# Altium PCB STATION_CT.PcbDoc
Units mil, origin at the board's own origin, x right, y up, seen from the top; angles counter-clockwise.
Board outline 2700 x 2450 mil, 2 copper layers (Top Layer, Bottom Layer); 29 components, 29 nets, 128 pads, 13 vias.
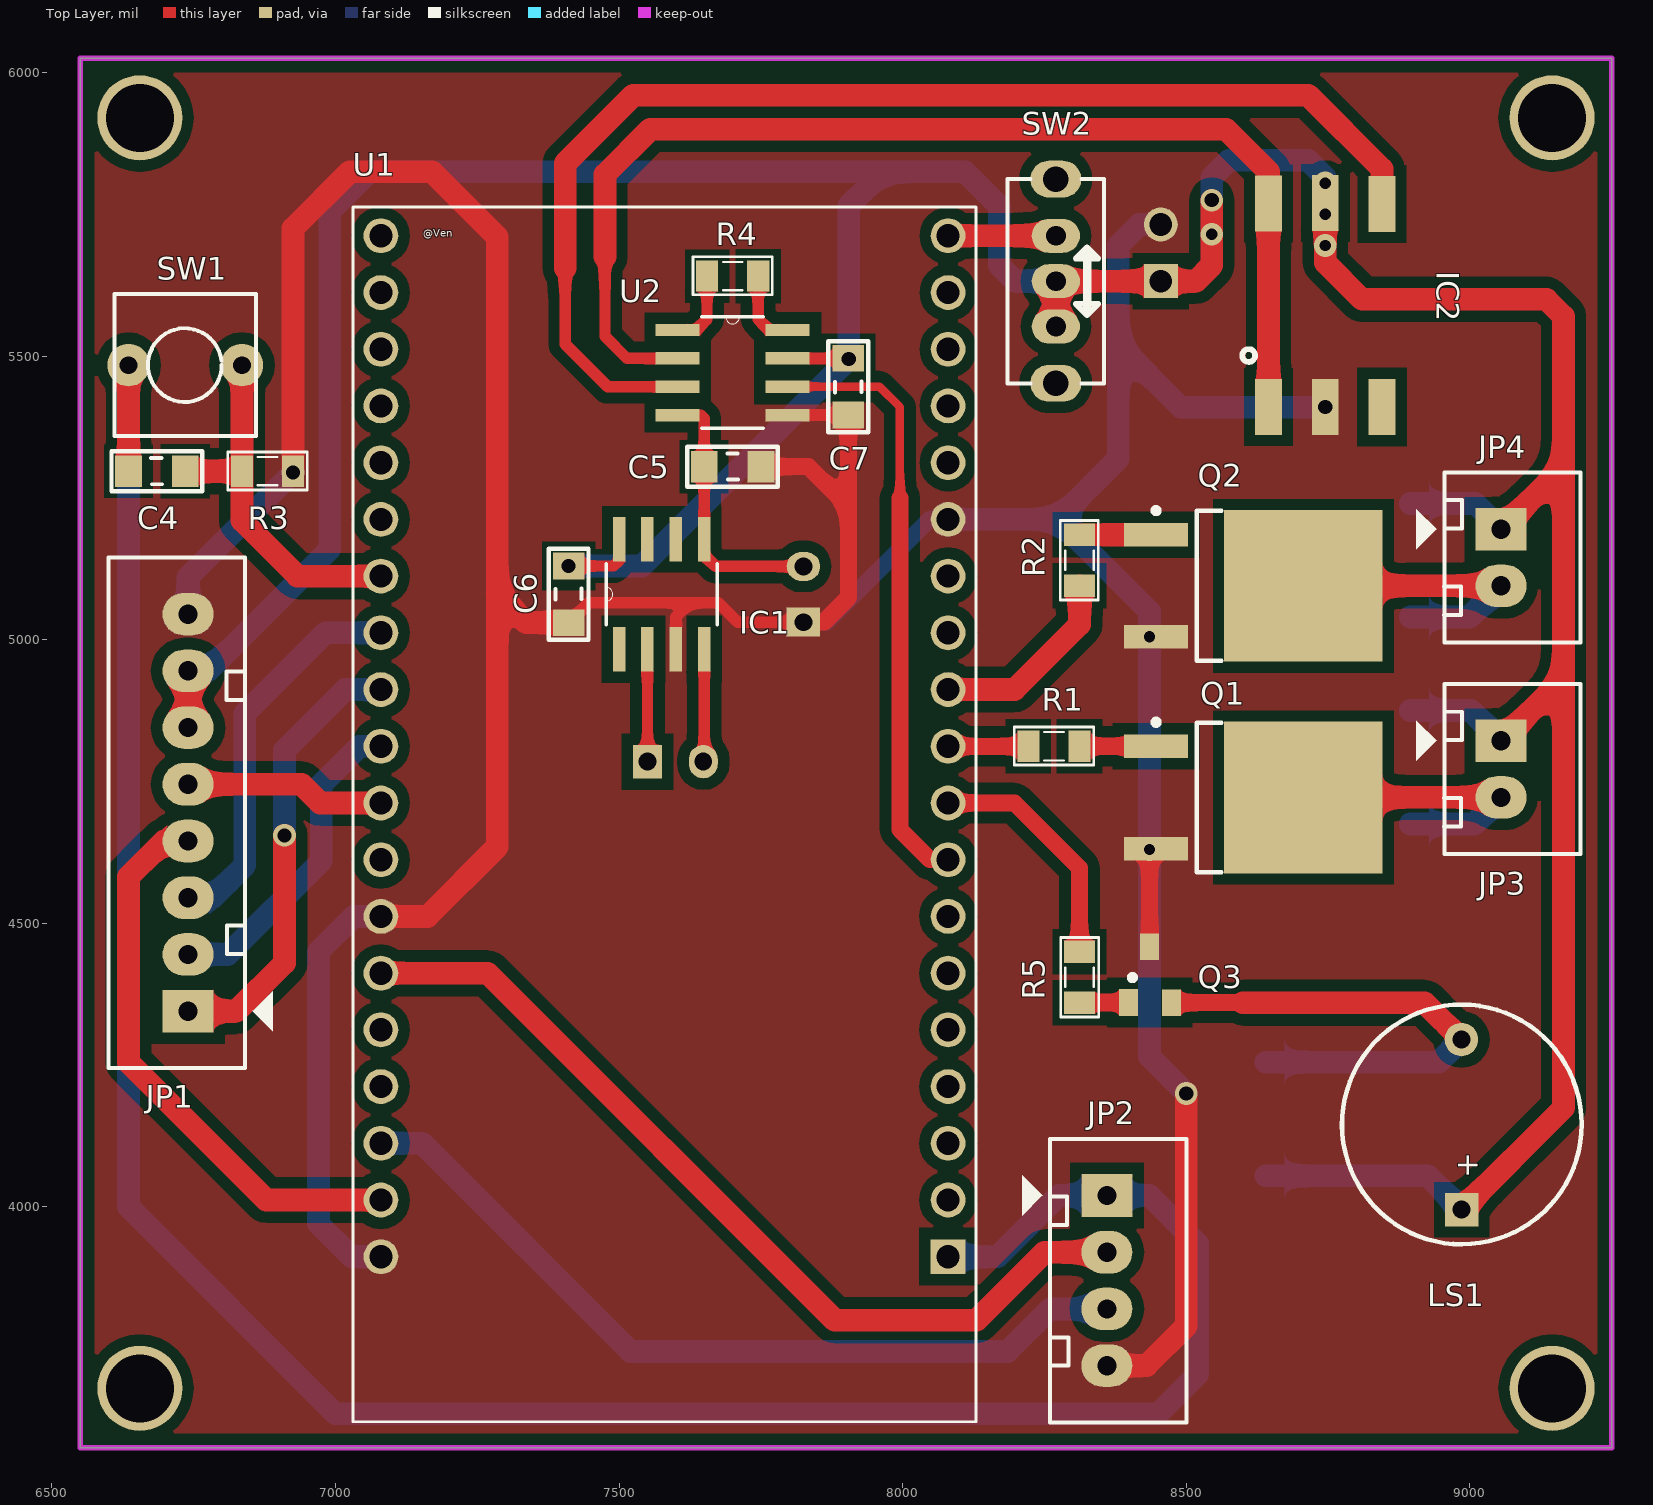
[diagram p0: Top Layer view]
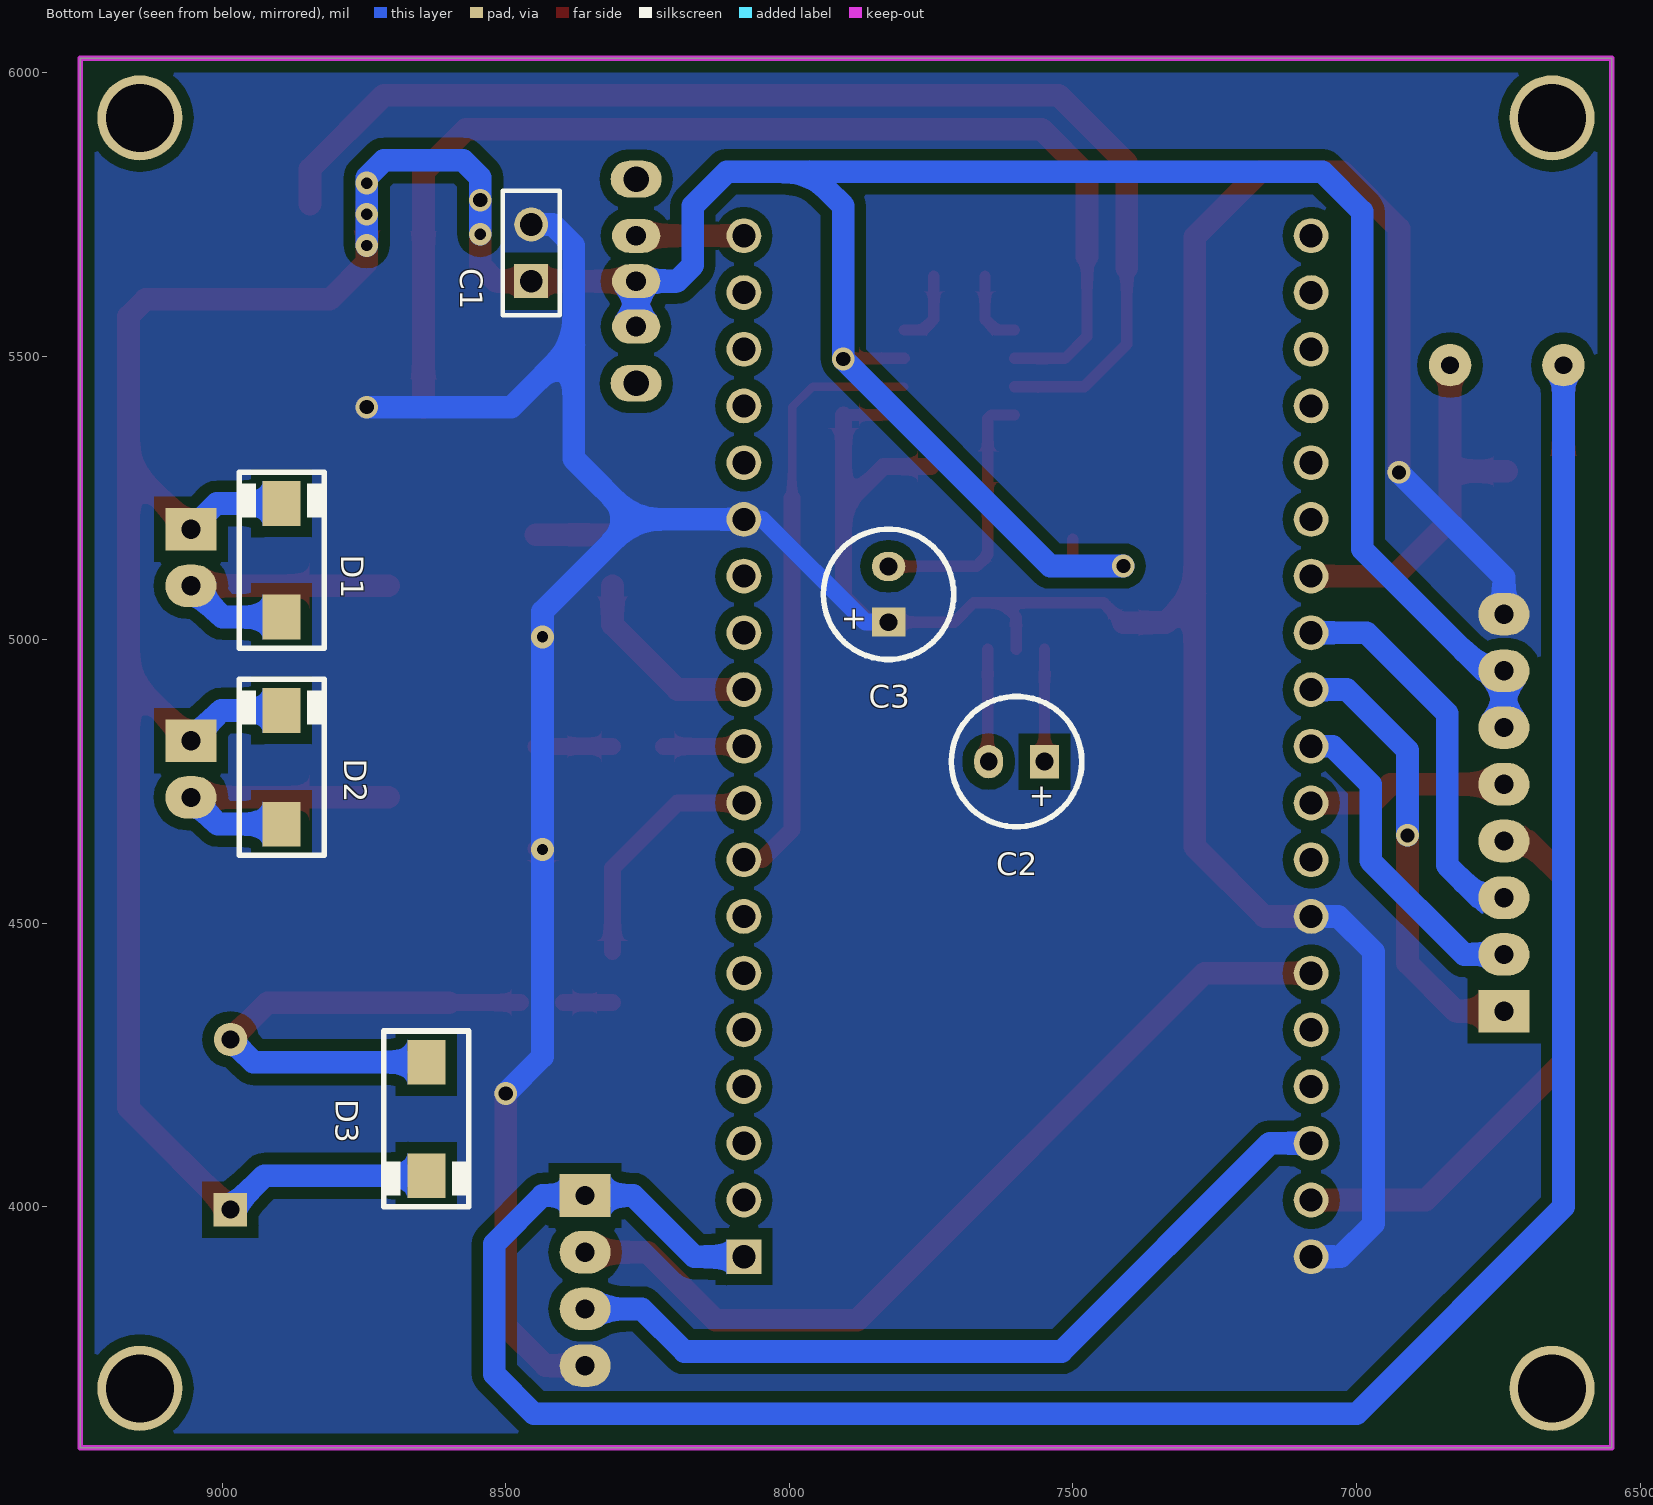
[diagram p1: Bottom Layer view, seen from below]
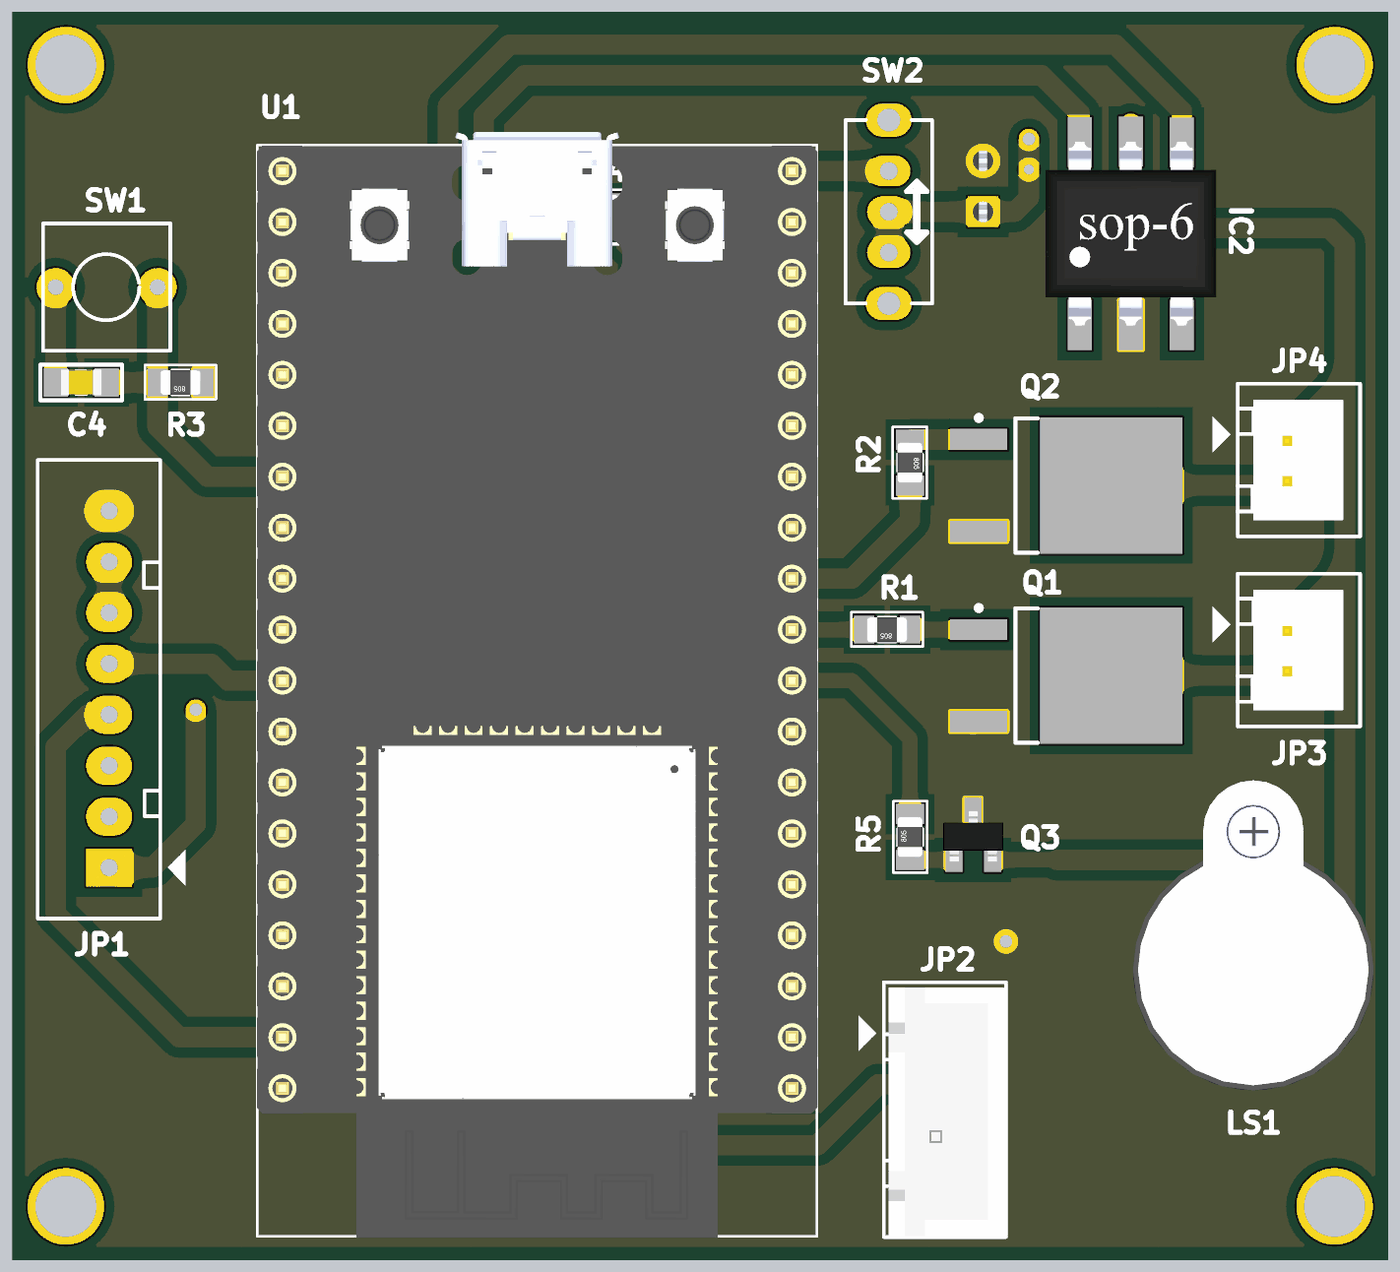
[diagram p2: 3D render of the assembled board from above, using the file's embedded part models]
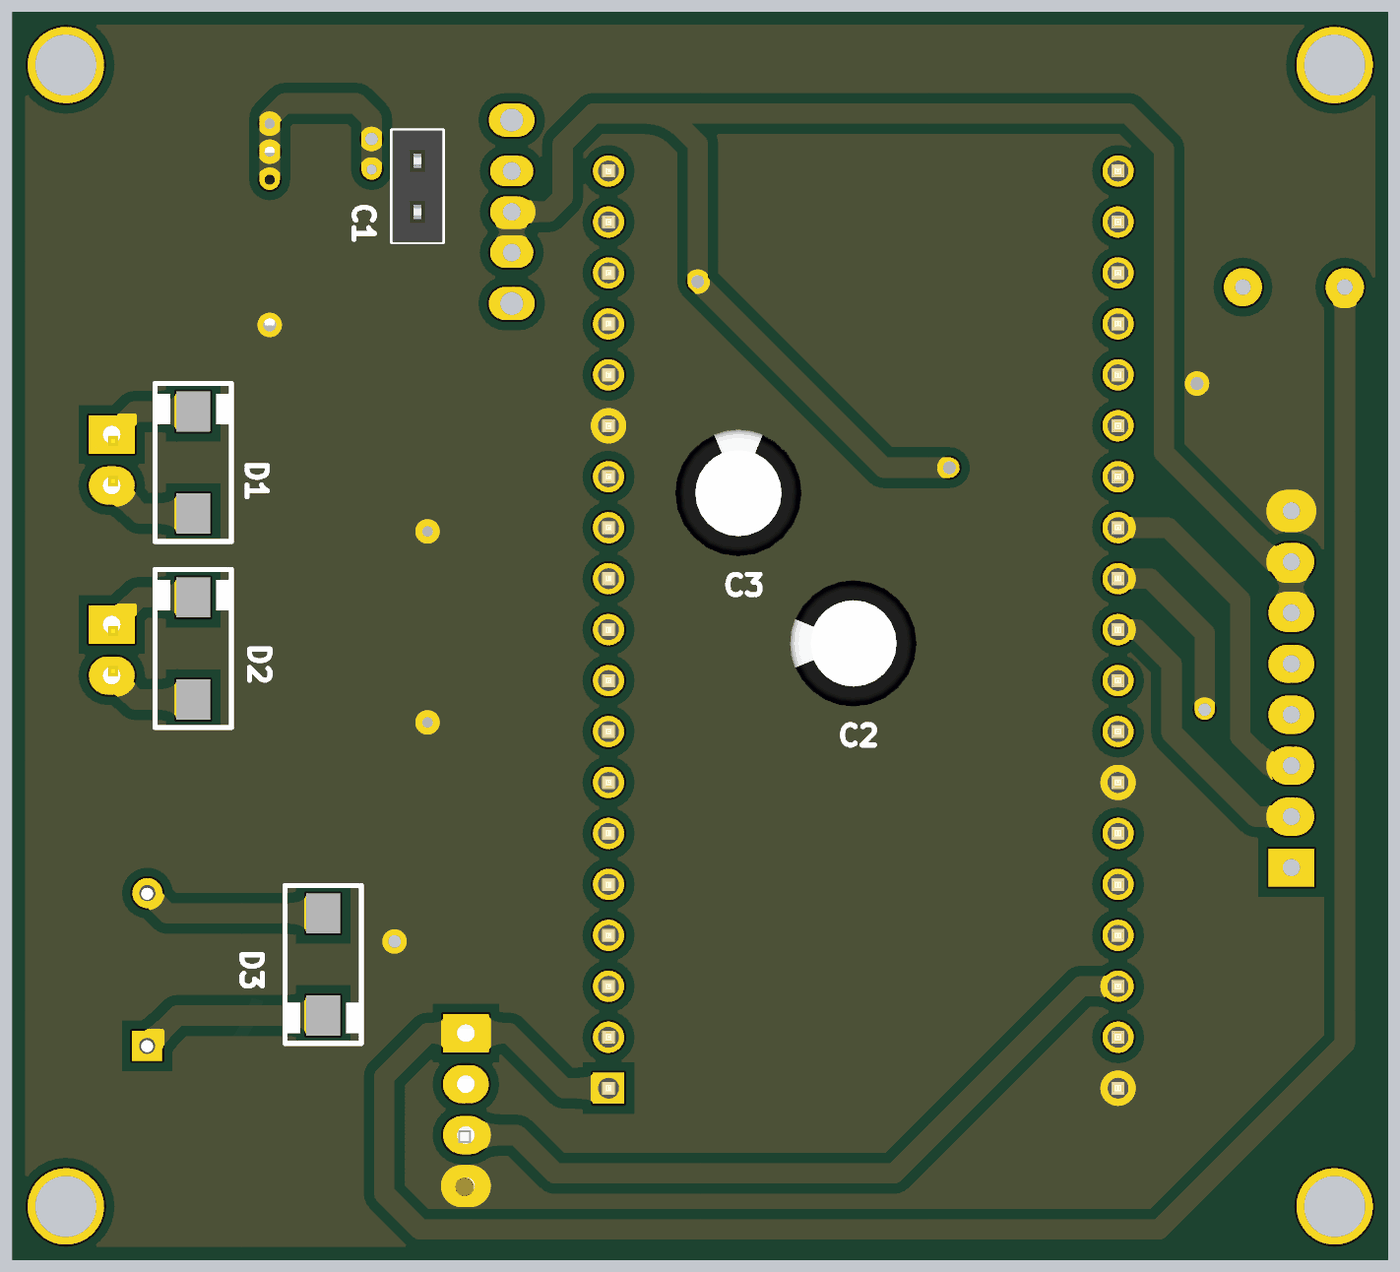
[diagram p3: 3D render of the assembled board from below, using the file's embedded part models]

## Layer stack, top to bottom
Top Solder: solder mask 0.4, Solder Resist, Dk 3.5
Top Layer: signal copper 1.4
Dielectric 1: dielectric 12.6, FR-4, Dk 4.8
Bottom Layer: signal copper 1.4
Bottom Solder: solder mask 0.4, Solder Resist, Dk 3.5

## Board outline
6550,3575 9250,3575 9250,6025 6550,6025

## Design rules (kind name [scope] priority, off if disabled: settings)
Clearance [All] p1: gap=20 ignorepadtopadclearanceinfootprint=TRUE except(0: Arc-Text Arc-Hole Track-Text Track-Hole SMDPad-Text SMDPad-Hole THPad-Text THPad-Hole Via-Text Via-Hole Fill-Text Fill-Hole Poly-Text Poly-Hole Region-Text Region-Hole Text-Text Text-Hole; 10: Arc-SMDPad Track-SMDPad)
PolygonConnect [All] p1: connectstyle=Direct reliefconductorwidth=10 reliefentries=4 polygonreliefangle="90 Angle" airgapwidth=10
RoutingVias [All] p1: holewidth=25 width=40 viastyle="Through Hole" minholewidth=20 minwidth=35 maxholewidth=30 maxwidth=50
SolderMaskExpansion [All] p1: expansion=4
Width [All] p1: maxlimit=40 minlimit=15 preferedwidth=30
30 further rules are at their usual default settings.

## Components (designator, comment, footprint, x,y, rotation, side; value= is the part's Value field where it differs from the comment)
C1 "JP2" JP2-C1T 8455,5632.05 r90 bottom
C2 "10uF/25V" C8mm 7599.21,4785 r0 bottom
C3 "10uF/25V" C8mm 7825,5080 r90 bottom
C4 "1uF" CAP_0805 6685,5296.05 r180 top value=33p
C5 "100nF" CAP_0805 7700,5306 r0 top value=33p
C6 "100nF" CAP_0805 7410,5080 r90 top value=33p
C7 "100nF" CAP_0805 7905,5446 r270 top value=33p
D1 "1N4007" SMA 8895,5140 r90 bottom
D2 "1N4007" SMA 8895,4775 r90 bottom
D3 "1N4007" SMA 8640,4155 r270 bottom
IC1 "ICL7660" SOP-8 7575,5080 r90 top
IC2 "MPS20N0040D-D" SOP-6 8526,5370 r0 top
JP1 "JP8" CON8 6740,4345 r90 top value="Connector 8"
JP2 "JP4" CON4 8360,4020 r270 top value="Connector 4"
JP3 "MOTOR" CON2 9055,4821.89 r270 top value="Connector 2"
JP4 "Valve" CON2 9055,5194.84 r270 top value="Connector 2"
LS1 "Speaker" SPEAKER 8985.5,3995 r90 top
Q1 "TIP41C" TO-252 8612.05,4721.89 r0 top
Q2 "TIP41C" TO-252 8612.05,5095 r0 top
Q3 "C1815" SOT23 8435,4409.21 r0 top value=D718
R1 "1k" RES-SMD-0805 8266.69,4812.05 r180 top
R2 "1k" RES-SMD-0805 8311.69,5139.84 r270 top
R3 "220k" RES-SMD-0805 6880,5297.05 r180 top
R4 "2k" RES-SMD-0805 7700,5641 r180 top
R5 "1k" RES-SMD-0805 8311.69,4405 r90 top
SW1 "SW1" SW2 6635,5484.09 r0 top value="SW chip 2 pin"
SW2 "ESP-SW" SW102 8270,5552.05 r90 top value="Switch 102 On Board"
U1 "ESP32" MODULE_ESP32-DEVKITC-32D 7580,4690 r180 top
U2 "INA128UA" SOP-8 7700,5471 r0 top

## Footprints (in the part's own frame and the unit in brackets; to place one, negate y for a bottom-side part, rotate by r counter-clockwise, add the part's x,y. Pads: shape width x height; smd on the part's side, far side on the other; paste and mask are expansions set on the pad)
C8mm [mm]
  rect 1.3x1.5 hole 0.8: 1(-1.25,0)
  oval 1.3x1.5 hole 0.8: 2(1.25,0)
  silkscreen extent -2.92,-2.92 2.92,2.92, body extent -3.15,-3.15 3.16,3.15, height 11.51
CAP_0805 [mm]
  rect 1.2x1.4 smd: 1(-1.27,-0.025) 2(1.27,-0.025)
  silkscreen extent -2.03,-0.91 2.03,0.86, body extent -1.01,-0.66 1.01,0.61, height 0.61
CON2 [mil] "CON2"
  rect 75x90 hole 34: 1(0,0)
  oval 75x90 hole 34: 2(100,0)
  silkscreen extent -100,-150 200,140, body extent -68,-70 168,107, height 236
CON4 [mil] "CON4"
  rect 75x90 hole 34: 1(0,0)
  oval 75x90 hole 34: 2(100,0) 3(200,0) 4(300,0)
  silkscreen extent -100,-150 400,140, body extent -90,-90 398,136, height 276
CON8 [mil] "CON8"
  rect 75x90 hole 34: 1(0,0)
  oval 75x90 hole 34: 2(100,0) 3(200,0) 4(300,0) 5(400,0) 6(500,0) 7(600,0) 8(700,0)
  silkscreen extent -100,-150 800,140
JP2-C1T [mm] "2 row, straight, gold plating"
  rect 1.52x1.52 hole 1.02: 1(0,0)
  round 1.52 hole 1.02: 2(2.54,0)
  silkscreen extent -1.52,-1.27 4.06,1.27, body extent -1.52,-1.25 4.06,1.25, height 8.51
MODULE_ESP32-DEVKITC-32D [mm]
  rect 1.56x1.56 hole 1.04: 1(-12.7,19.76)
  round 1.56 hole 1.04: 2(-12.7,17.22) 3(-12.7,14.68) 4(-12.7,12.14) 5(-12.7,9.6) 6(-12.7,7.06) 7(-12.7,4.52) 8(-12.7,1.98) 9(-12.7,-0.56) 10(-12.7,-3.1) 11(-12.7,-5.64) 12(-12.7,-8.18) 13(-12.7,-10.72) 14(-12.7,-13.26) 15(-12.7,-15.8) 16(-12.7,-18.34) 17(-12.7,-20.88) 18(-12.7,-23.42) 19(-12.7,-25.96) 20(12.7,19.76) 21(12.7,17.22) 22(12.7,14.68) 23(12.7,12.14) 24(12.7,9.6) 25(12.7,7.06) 26(12.7,4.52) 27(12.7,1.98) 28(12.7,-0.56) 29(12.7,-3.1) 30(12.7,-5.64) 31(12.7,-8.18) 32(12.7,-10.72) 33(12.7,-13.26) 34(12.7,-15.8) 35(12.7,-18.34) 36(12.7,-20.88) 37(12.7,-23.42) 38(12.7,-25.96)
  silkscreen extent -13.95,-27.25 13.95,27.15, body extent -13.97,-27.9 13.97,27.2, height 8.25
RES-SMD-0805 [mil]
  rect 39.37x55 smd: 1(-45,0) 2(45,0)
  silkscreen extent -70,-34 70,33, body extent -39,-25 39,25, height 31
SMA [mm]
  rect 2x1.7 smd: 1(-2.544,0) 2(2.544,0)
  silkscreen extent -3.94,-1.9 3.94,1.91, body extent -2.87,-1.4 2.87,1.4, height 2.29
SOP-6 [mm]
  rect 1.2x2.5 smd: 1(3.023,1.016) 2(5.563,1.016) 3(8.103,1.016) 4(8.103,10.109) 5(5.563,10.16) 6(3.023,10.135)
  silkscreen extent 1.85,3.04 2.42,3.61, body extent 0,0 9.82,10.16, height 4
SOP-8 [mil]
  rect 78x22 smd: 1(-97,75) 2(-97,25) 3(-97,-25) 4(-97,-75) 5(97,-75) 6(97,-25) 7(97,25) 8(97,75)
  silkscreen extent -54,-98 54,98
SOT23 [mm] "SOT 23 _ 1-3-2"
  rect 0.85x1.2 smd: 1(-0.94,-1.245) 2(0.985,-1.25) 3(0.005,1.25)
  silkscreen extent -0.88,-0.25 -0.64,0, body extent -1.47,-1.33 1.53,1.17, height 1.06
SPEAKER [mm]
  rect 1.5x1.5 hole 0.8: 1(0,0)
  round 1.5 hole 0.8: 2(7.62,0.013)
  silkscreen extent -1.55,-5.38 9.18,5.36, body extent -2.22,-6 13.24,6, height 4.5
SW2 [mil] "SW button 2pin, 250x 250 mil"
  round 75 hole 31: 1(0,0) 2(200,0)
  silkscreen extent -25,-125 225,125
SW102 [mil] "Switch 102 On Board nho"
  oval 60x85 hole 35: 1(0,0) 2(80,0) 3(160,0)
  oval 65x90 hole 45: 4(260,0) 5(-100,0)
  silkscreen extent -100,-85 260,85
TO-252 [mm] "KVU D-PAK, 3-Pads, Body 6,2x6,7mm (max), IPC Medium Density"
  rect 2.85x1.05 smd: 1(-4.2,2.29) 3(-4.2,-2.29)
  rect 7.1x6.8 smd: 2(2.4,0)
  silkscreen extent -4.32,-3.35 -1.27,3.49, body extent -5.03,-3.35 5.08,3.35, height 2.4

## Part data
C1: "WR-PHD 2.54 mm Angled Socket Header", Manufacturer="Würth Elektronik eiSos GmbH", partNo=613002143121, ComponentLink1 Description=Manufacturer, ComponentLink1URL=http://www.we-online.com, ComponentLink2 Description=Datasheet, ComponentLink2URL=http://katalog.we-online.de/em/datasheet/6130xx143121.pdf, Created by="Karrer Zheng", Created Date="29 March 2013", NoPins=02
C2 C3: library part "Cap Pol", "Polarized Capacitor (Axial)", LatestRevisionDate=17-Jul-2002, LatestRevisionNote="Re-released for DXP Platform.", PackageReference=POLAR0.8, Published=8-Jun-2000, Publisher="Altium Limited"
C4 C5 C6 C7: library part CapSMD, "Capacitor", LatestRevisionDate=17-Jul-2002, LatestRevisionNote="Re-released for DXP Platform.", PackageReference=RAD-0.3, Published=8-Jun-2000, Publisher="Altium Limited"
D1 D2 D3: library part D1A, "Diode 1A"
IC1: "CMOS Voltage Converters", Creator="Nguyen Ba Bien"
IC2: "Pressure Sensor"
JP1: library part Con8, "Connector 8"
JP2: library part Con4, "Connector 4"
JP3 JP4: library part Con2, "Connector 2"
LS1: "Loudspeaker", LatestRevisionDate=17-Jul-2002, LatestRevisionNote="Re-released for DXP Platform.", PackageReference=PIN2, Published=24-Mar-1999, Publisher="Altium Limited"
Q1 Q2: "NPN 2W, BCE", =H1061
Q3: library part 2SC5200, "Transistor"
R1 R2 R3 R4 R5: library part "Resistor - SMD", "Resistor", Manufacturer="Generic Components", Class=Passive, Published=08/06/2000, Publisher="Altium Hobart Technology Centre"
SW1: library part SW2, "Switch button 2 pin"
SW2: library part SW102A, "Switch 102 on Broad"
U1: library part ESP32-DEVKITC-32D, "EVAL BOARD FOR ESP-WROOM-32", Package=None, Availability=Warning, Check_prices=https://www.snapeda.com/parts/ESP32-DEVKITC-32D/Espressif%20Systems/view-part/2777395/?ref=eda, MF="Espressif Systems", MP=ESP32-DEVKITC-32D, Price=None, Purchase-URL=https://pricing.snapeda.com/search/part/ESP32-DEVKITC-32D/?ref=eda, SnapEDA_Link=https://www.snapeda.com/parts/ESP32-DEVKITC-32D/Espressif%20Systems/view-part/2777395/?ref=snap
U2: library part AD620AN, "Low-Cost, Low-Power Instrumentation Amplifier", ComponentLink1Description="Manufacturer Link", ComponentLink1URL=http://www.analog.com/en/prod/0%2C2877%2CAD620%2C00.html, ComponentLink2Description=Datasheet, ComponentLink2URL=http://www.analog.com/UploadedFiles/Data_Sheets/897653854AD620_g.pdf, DatasheetVersion="REV.D 1998", LatestRevisionDate=04-Mar-2005, LatestRevisionNote="Stylized 3D Model Added.", PackageDescription="DIP; 8 Leads; Row Spacing 7.62 mm; Pitch 2.54 mm", PackageReference=N-8, PackageVersion=revA, Published=8-Jun-2000, Publisher="Altium Limited"

## Free pads (board coordinates)
  round 150 hole 120: 0(6655,3680) 0(6655,5920) 0(9145,3680) 0(9145,5920)

## Via types
v1: diameter 40, hole 25, Top Layer to Bottom Layer, 7 vias
v2: diameter 40, hole 20, Top Layer to Bottom Layer, 6 vias

## Nets (pads, with @x,y where several pads share a name; then routed paths per layer and width w, separated by ;. In a path a pad name is that pad's centre, name@x,y a point inside that pad or via, vN(x,y) a via of type N, cw(c..) or ccw(c..) an arc to the next point about the centre after c; other vN are vias at no path point)
3.3V: C4.2 JP2.1 SW1.1 U1.1 | length 4486.2
  Top Layer w40: C4.2 SW1.1
  Bottom Layer w40: SW1.1 6635,4000 7000,3635 8450,3635 8520,3705 8520,3935 8435,4020 JP2.1 8275,4020 8167.05,3912.05 U1.1
5V: C1.1 C6.2 C7.1 D1.2 D2.2 D3.2 IC1.8 IC2.5 JP1.6 JP1.7 JP3.1 JP4.1 LS1.1 SW2.1 SW2.2 U2.7 | length 8084
  Top Layer w20: v1(7411,5130) 7490,5130 7500,5140 IC1.8 ; U2.7 C7.1
  Top Layer w40: JP1.6 JP1.7 ; SW2.1 SW2.2 C1.1 8517.05,5632.05 8545,5660 v2(8545,5715) v1(8545,5775) ; IC2.5 v2(8745,5750) v2(8745,5695) 8745,5665 8810,5600 9135,5600 9165,5570 9165,5304.84 ; LS1.1 9165,4174.5 9165,4931.89 ; JP3.1 9165,4931.89 ; JP4.1 9165,5304.84 ; 9165,4931.89 9165,5304.84
  Bottom Layer w40: JP1.6 JP1.7 6775,4945 6990,5160 6990,5755 7060,5825 7965,5825 ; v1(7411,5130) 7540,5130 v1(7905,5495) 7905,5765 7935,5795 7965,5825 ; SW2.1 SW2.2 8197.95,5632.05 8170,5660 8170,5765 8110,5825 7965,5825 ; v2(8545,5715) v1(8545,5775) 8545,5815 8575,5845 8715,5845 8745,5815 v2(8745,5805) v2(8745,5750) v2(8745,5695) ; D3.2 8925.66,4054.84 LS1.1 ; D2.2 9001.73,4875.16 JP3.1 ; D1.2 9009.69,5240.16 JP4.1
-5V: C3.2 C5.1 IC1.5 U2.4 | length 473.6
  Top Layer w20: U2.4 7644,5396 7650,5390 C5.1 IC1.5 7650,5149.21 7670,5129.21 C3.2
ADC1: U1.8 U2.6 | length 1064.8
  Top Layer w15: U2.6 7959,5446 7995,5410 7995,5250
  Top Layer w30: 7995,5250 7995,4665 8047.95,4612.05 U1.8
Buzzer: R5.2 U1.9 | length 426.6
  Top Layer w30: U1.9 8197.05,4712.05 8311.69,4597.4 R5.2
ESP32-04-Button1: C4.1 R3.2 SW1.2 U1.32 | length 659.7
  Top Layer w40: C4.1 R3.2 ; SW1.2 R3.2 ; U1.32 6932.95,5112.05 6835,5210 R3.2
ESP32-05-SS: JP1.2 U1.29 | length 571.1
  Bottom Layer w40: JP1.2 6810,4445 6975,4610 6975,4745 7042.05,4812.05 U1.29
ESP32-16-DC: JP1.3 U1.31 | length 690.3
  Bottom Layer w40: JP1.3 6782.95,4545 6840,4602.05 6840,4869.84 6982.2,5012.05 U1.31
ESP32-17-RS: JP1.1 U1.30 | length 794.5
  Top Layer w40: JP1.1 6825,4345 6910,4430 v1(6910,4655)
  Bottom Layer w40: v1(6910,4655) 6910,4805 7017.05,4912.05 U1.30
ESP32-18-SCK: JP1.5 U1.28 | length 353.6
  Top Layer w40: JP1.5 6940,4745 6972.95,4712.05 U1.28
ESP32-21-SDA: JP2.2 U1.25 | length 1583.2
  Top Layer w40: U1.25 7267.95,4412.05 7880,3800 8130,3800 8250,3920 JP2.2
ESP32-22-SCL: JP2.3 U1.22 | length 1463.1
  Bottom Layer w40: U1.22 7152.95,4112.05 7520,3745 8185,3745 8260,3820 JP2.3
ESP32-23-MOSI: JP1.4 U1.21 | length 1003.8
  Top Layer w40: JP1.4 6697.95,4645 6635,4582.05 6635,4255 6877.95,4012.05 U1.21
GND: C1.2 C3.1 C5.2 C6.1 C7.2 IC1.3 IC2.2 JP1.8 JP2.4 Q1.3 Q2.3 Q3.3 R3.1 U1.14 U1.20 U1.26 U2.5 | length 8092
  Top Layer w20: C6.1 7446,5065 7625,5065 ; IC1.3 7600,5040 7625,5065 ; U2.5 C7.2 ; C3.1 7709.21,5030.79 7675,5065 7625,5065
  Top Layer w30: C5.2 7834,5305 7904,5235 ; C3.1 7860.79,5030.79 7904,5074 7904,5235 ; C7.2 7904,5235 ; Q3.3 8435.2,4620.24 Q1.3
  Top Layer w40: v1(6925,5295) R3.1 6925,5725 7025,5825 7170,5825 7285,5710 7285,5081.69 ; U1.26 7162.05,4512.05 7285,4635 7285,5081.69 ; C6.1 7336.69,5030 7285,5081.69 ; JP2.4 8430,3720 8500,3790 v1(8500,4200)
  Bottom Layer w30: C3.1 7865.79,5030.79 8047.05,5212.05 U1.14
  Bottom Layer w40: JP1.8 6740,5110 v1(6925,5295) ; U1.20 7027.95,3912.05 6970,3970 6970,4450 7032.05,4512.05 U1.26 ; U1.14 8272.95,5212.05 ; C1.2 8417.05,5732.05 8380,5695 8380,5520 ; v1(8500,4200) 8435.2,4264.8 v2(8435.2,4630) v2(8435.2,5004.84) 8435.2,5049.8 8272.95,5212.05 ; v1(8745,5410) 8490,5410 8380,5520 ; 8272.95,5212.05 8380,5319.09 8380,5520
Motor: R1.2 U1.10 | length 141.7
  Top Layer w30: U1.10 R1.2
NetC2_1: C2.1 IC1.2 | length 198
  Top Layer w20: C2.1 IC1.2
NetC2_2: C2.2 IC1.4 | length 198.7
  Top Layer w20: C2.2 7650,4786.57 IC1.4
NetD1_1: D1.1 JP4.2 Q2.2 | length 531.3
  Top Layer w40: Q2.2 9054.84,5095 JP4.2
  Bottom Layer w40: D1.1 9000,5039.84 JP4.2
NetD2_1: D2.1 JP3.2 Q1.2 | length 528
  Top Layer w40: Q1.2 JP3.2
  Bottom Layer w40: D2.1 9007.95,4674.84 JP3.2
NetD3_1: D3.1 LS1.2 Q3.2 | length 899.6
  Top Layer w30: Q3.2 8600,4360
  Top Layer w40: 8600,4360 8920,4360 LS1.2
  Bottom Layer w40: D3.1 8945.16,4255.16 LS1.2
NetIC2_1: IC2.1 IC2.6 U2.2 | length 2078.4
  Top Layer w20: 7475,5675 7475,5535 7514,5496 U2.2
  Top Layer w40: 7475,5675 7475,5820 7555,5900 8570,5900 8645,5825 IC2.6 IC2.1
NetIC2_4: IC2.4 U2.3 | length 2153.6
  Top Layer w20: 7405,5655 7405,5521 7480,5446 U2.3
  Top Layer w40: 7405,5655 7405,5840 7525,5960 8715,5960 8845,5830 IC2.4
NetQ1_1: Q1.1 R1.1 | length 135
  Top Layer w30: R1.1 Q1.1
NetQ2_1: Q2.1 R2.1 | length 135.1
  Top Layer w40: R2.1 8446.38,5184.84 Q2.1
NetQ3_1: Q3.1 R5.1 | length 86.4
  Top Layer w30: R5.1 8311.9,4360.21 Q3.1
NetR4_1: R4.1 U2.8 | length 135.9
  Top Layer w20: R4.1 7745,5565 7764,5546 U2.8
NetR4_2: R4.2 U2.1 | length 135.9
  Top Layer w20: U2.1 7636,5546 7655,5565 R4.2
NetSW2_3: SW2.3 U1.19 | length 190
  Top Layer w40: U1.19 SW2.3
Valve: R2.2 U1.11 | length 347.3
  Top Layer w40: U1.11 8197.05,4912.05 8311.69,5026.69 R2.2
pads on no net: IC1.1 IC1.6 IC1.7 IC2.3 SW2.4 SW2.5 U1.2 U1.3 U1.4 U1.5 U1.6 U1.7 U1.12 U1.13 U1.15 U1.16 U1.17 U1.18 U1.23 U1.24 U1.27 U1.33 U1.34 U1.35 U1.36 U1.37 U1.38

## Polygon pours and split planes (outlines as drawn)
GND on Top Layer "GND_L01_P000" (solid, remove dead copper, pour order 0): 6550,3575 9250,3575 9250,6025 6550,6025
GND on Bottom Layer "GND_L02_P002" (solid, remove dead copper, pour order 2): 6550,3575 9250,3575 9250,6025 6550,6025

## Keep-outs
Keep-Out Layer:
  the board outline again, w10

## Silkscreen, mask and mechanical layers (free items; w line width, h text height)
Top Overlay:
  text "@Ven" at 7155,5710 h13

## Text inside footprints (layer, text, board x,y; h text height)
C2: Bottom Overlay "+" at 7532.21,4741 h40 r180
C3: Bottom Overlay "+" at 7869,5013 h40 r270
LS1: Top Overlay "+" at 9013.5,4050.5 h40 r90